# Altium PCB RF315Mhz.PcbDoc (part 5 of 5)
Units mil, origin at the board's own origin, x right, y up, seen from the top; angles counter-clockwise.
Board outline 4094.49 x 3779.53 mil, 2 copper layers (Top Layer, Bottom Layer); 180 components, 20 nets, 660 pads, 48 vias.
Unrouted connection lines stored in the file: 100.
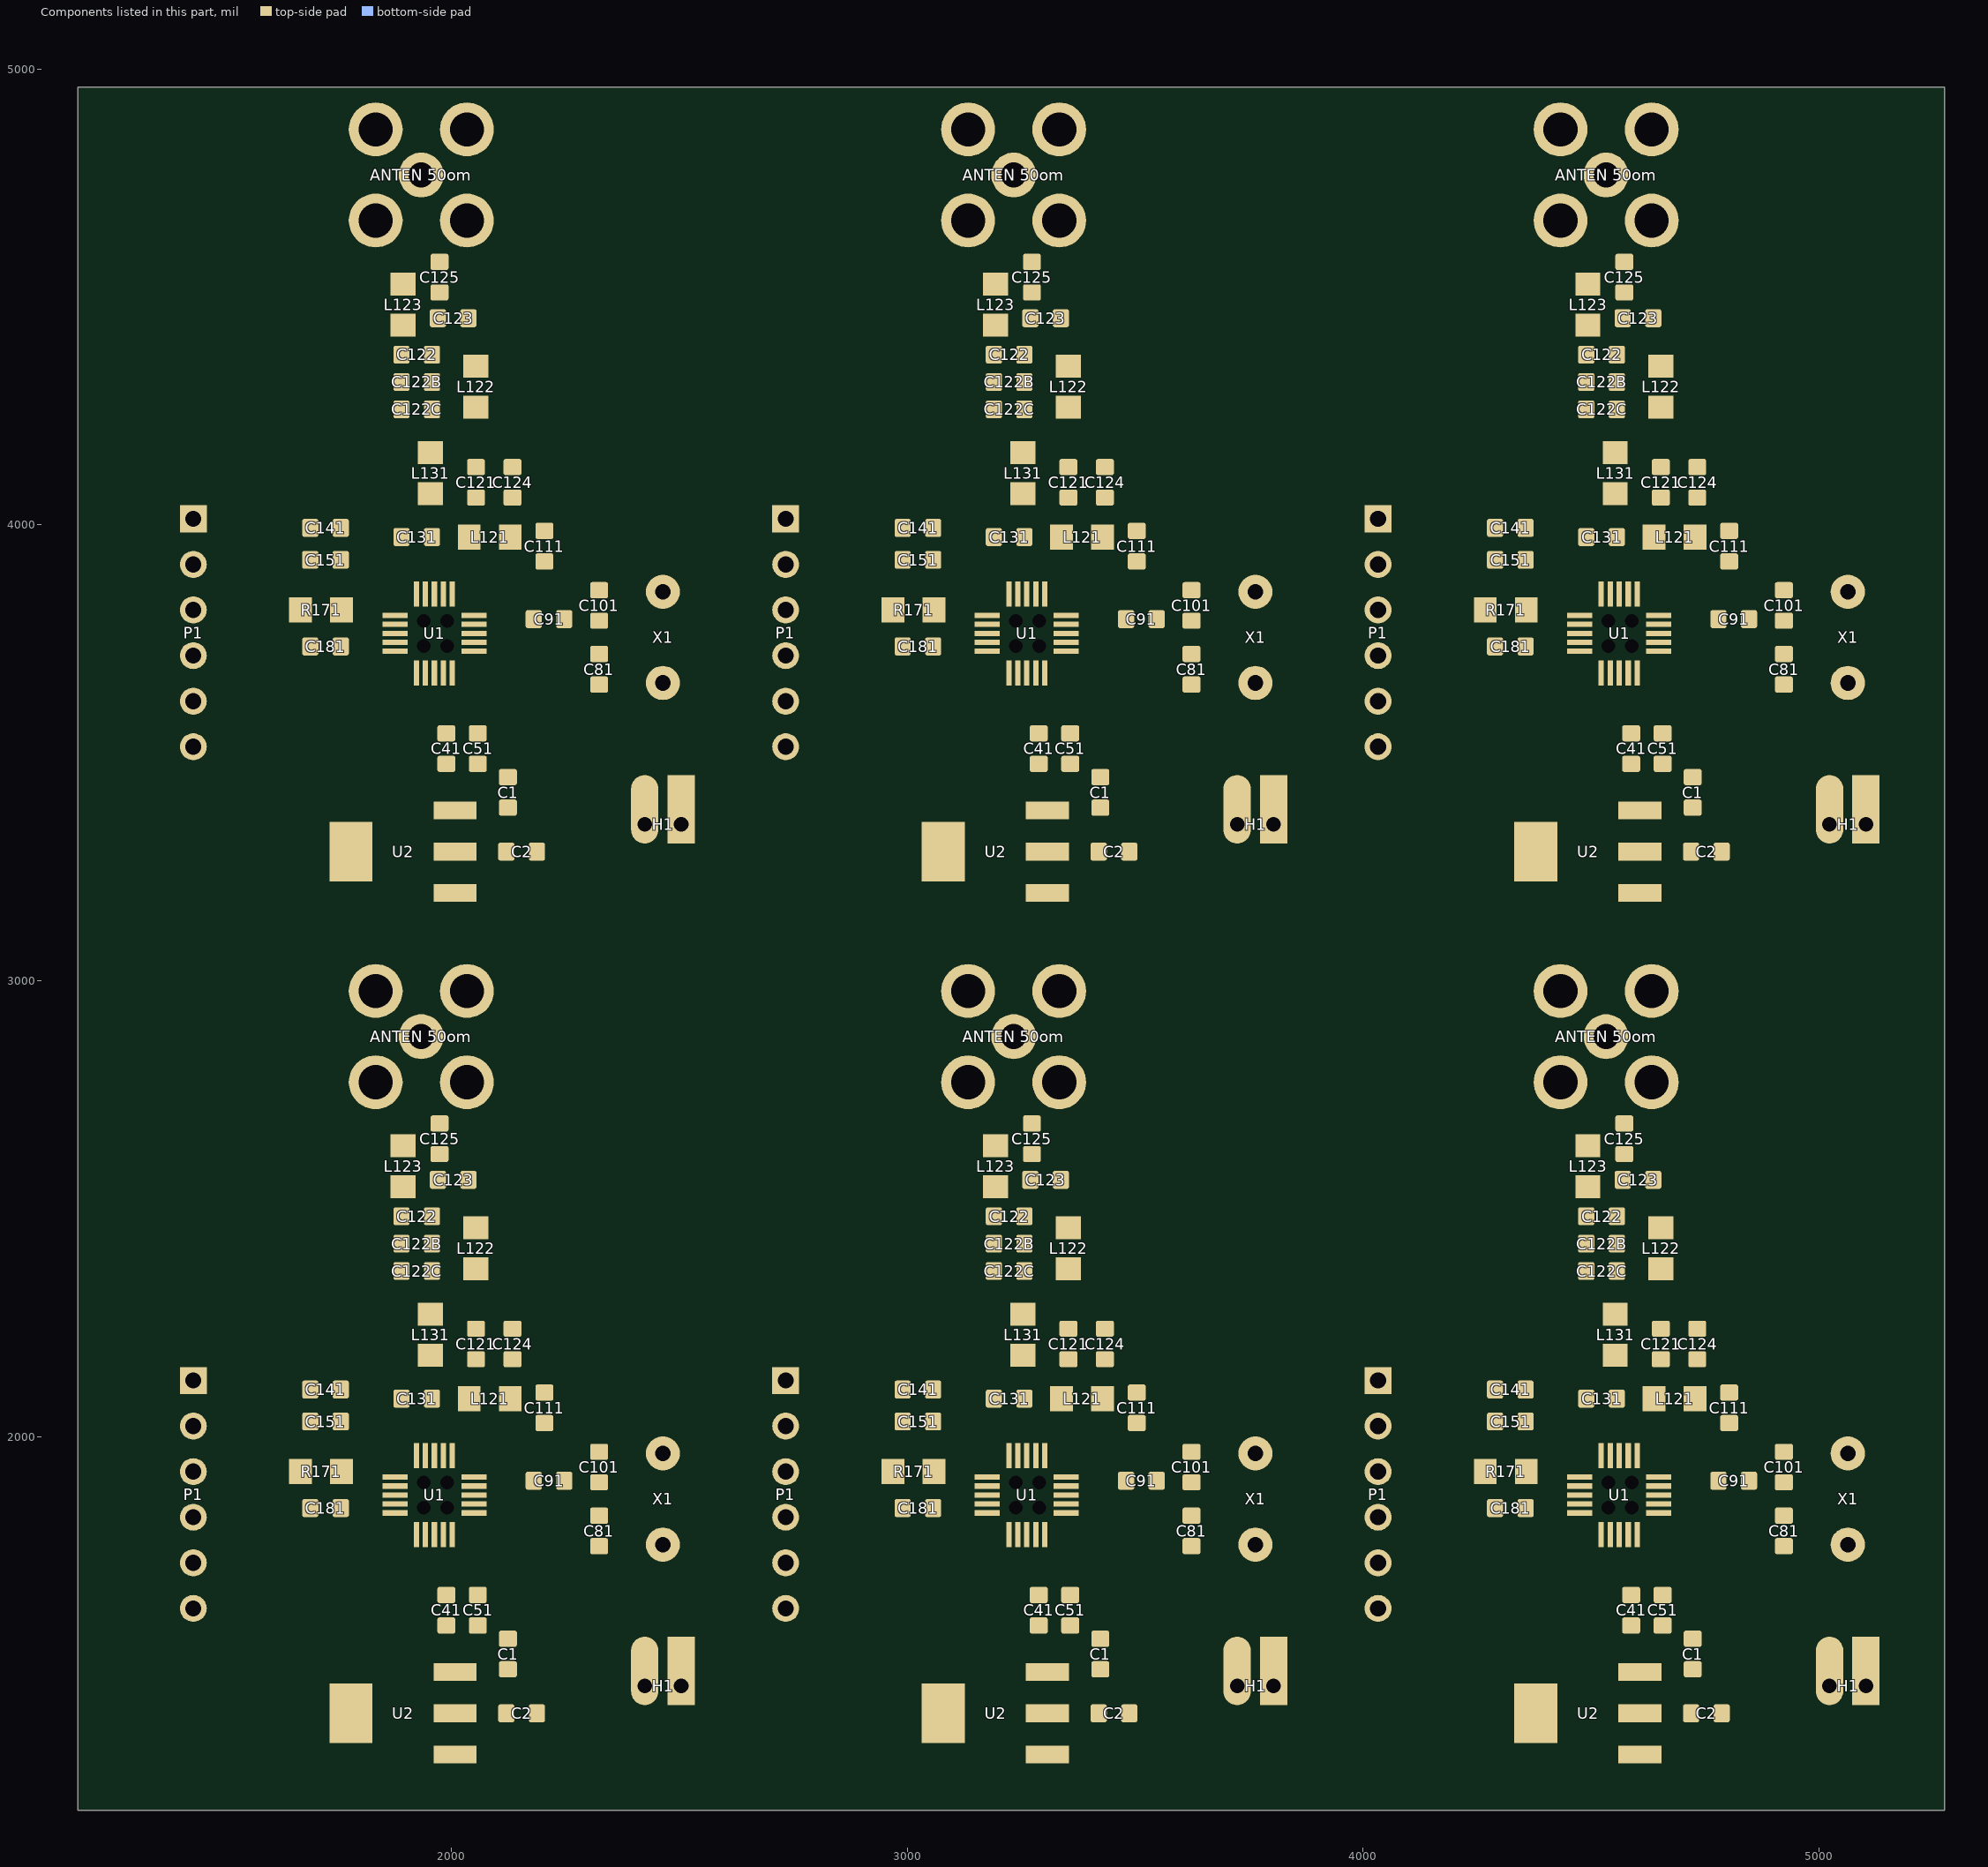
[diagram p5: the components of this part, seen from the top]

## Via types
v1: diameter 50, hole 28, Top Layer to Bottom Layer, 48 vias

## Nets (pads, with @x,y where several pads share a name; then routed paths per layer and width w, separated by ;. In a path a pad name is that pad's centre, name@x,y a point inside that pad or via, vN(x,y) a via of type N, cw(c..) or ccw(c..) an arc to the next point about the centre after c; other vN are vias at no path point) (continued)
copper on no net: (continued)
  Top Layer w1: 5111.99,4848.54 5115.99,4848.54 ; 5111.99,4849.54 5114.99,4849.54 ; 5111.99,4850.54 5114.99,4850.54 ; 5112.99,2802.78 5115.99,2802.78 ; 5112.99,2803.78 5115.99,2803.78 ; 5112.99,2956.78 5115.99,2956.78 ; 5112.99,2957.78 5115.99,2957.78 ; 5112.99,4692.54 5115.99,4692.54 ; 5112.99,4693.54 5115.99,4693.54 ; 5112.99,4846.54 5115.99,4846.54 ; 5112.99,4847.54 5115.99,4847.54 ; 5113.99,2804.78 5116.99,2804.78 ; 5113.99,2805.78 5116.99,2805.78 ; 5113.99,2806.78 5116.99,2806.78 ; 5113.99,2807.78 5116.99,2807.78 ; 5113.99,2952.78 5117.99,2952.78 ; 5113.99,2953.78 5116.99,2953.78 ; 5113.99,2954.78 5116.99,2954.78 ; 5113.99,2955.78 5116.99,2955.78 ; 5113.99,4694.54 5116.99,4694.54 ; 5113.99,4695.54 5116.99,4695.54 ; 5113.99,4696.54 5116.99,4696.54 ; 5113.99,4697.54 5116.99,4697.54 ; 5113.99,4842.54 5117.99,4842.54 ; 5113.99,4843.54 5116.99,4843.54 ; 5113.99,4844.54 5116.99,4844.54 ; 5113.99,4845.54 5116.99,4845.54 ; 5114.99,2808.78 5117.99,2808.78 ; 5114.99,2809.78 5117.99,2809.78 ; 5114.99,2810.78 5117.99,2810.78 ; 5114.99,2811.78 5117.99,2811.78 ; 5114.99,2812.78 5117.99,2812.78 ; 5114.99,2813.78 5117.99,2813.78 ; 5114.99,2814.78 5117.99,2814.78 ; 5114.99,2815.78 5117.99,2815.78 ; 5114.99,2816.78 5117.99,2816.78 ; 5114.99,2817.78 5117.99,2817.78 ; 5114.99,2818.78 5117.99,2818.78 ; 5114.99,2819.78 5117.99,2819.78 ; 5114.99,2820.78 5117.99,2820.78 ; 5114.99,2821.78 5117.99,2821.78 ; 5114.99,2822.78 5117.99,2822.78 ; 5114.99,2823.78 5117.99,2823.78 ; 5114.99,2824.78 5117.99,2824.78 ; 5114.99,2825.78 5117.99,2825.78 ; 5114.99,2826.78 5117.99,2826.78 ; 5114.99,2827.78 5117.99,2827.78 ; 5114.99,2828.78 5117.99,2828.78 ; 5114.99,2829.78 5117.99,2829.78 ; 5114.99,2830.78 5117.99,2830.78 ; 5114.99,2831.78 5117.99,2831.78 ; 5114.99,2832.78 5117.99,2832.78 ; 5114.99,2833.78 5117.99,2833.78 ; 5114.99,2834.78 5117.99,2834.78 ; 5114.99,2835.78 5117.99,2835.78 ; 5114.99,2836.78 5117.99,2836.78 ; 5114.99,2837.78 5117.99,2837.78 ; 5114.99,2838.78 5117.99,2838.78 ; 5114.99,2839.78 5117.99,2839.78 ; 5114.99,2840.78 5117.99,2840.78 ; 5114.99,2841.78 5117.99,2841.78 ; 5114.99,2842.78 5117.99,2842.78 ; 5114.99,2843.78 5117.99,2843.78 ; 5114.99,2844.78 5117.99,2844.78 ; 5114.99,2845.78 5117.99,2845.78 ; 5114.99,2846.78 5117.99,2846.78 ; 5114.99,2847.78 5117.99,2847.78 ; 5114.99,2848.78 5117.99,2848.78 ; 5114.99,2849.78 5117.99,2849.78 ; 5114.99,2850.78 5117.99,2850.78 ; 5114.99,2851.78 5117.99,2851.78 ; 5114.99,2852.78 5117.99,2852.78 ; 5114.99,2853.78 5117.99,2853.78 ; 5114.99,2854.78 5117.99,2854.78 ; 5114.99,2855.78 5117.99,2855.78 ; 5114.99,2856.78 5117.99,2856.78 ; 5114.99,2857.78 5117.99,2857.78 ; 5114.99,2858.78 5117.99,2858.78 ; 5114.99,2859.78 5117.99,2859.78 ; 5114.99,2860.78 5117.99,2860.78 ; 5114.99,2861.78 5117.99,2861.78 ; 5114.99,2862.78 5117.99,2862.78 ; 5114.99,2863.78 5117.99,2863.78 ; 5114.99,2864.78 5117.99,2864.78 ; 5114.99,2865.78 5117.99,2865.78 ; 5114.99,2866.78 5117.99,2866.78 ; 5114.99,2867.78 5117.99,2867.78 ; 5114.99,2868.78 5117.99,2868.78 ; 5114.99,2869.78 5117.99,2869.78 ; 5114.99,2870.78 5117.99,2870.78 ; 5114.99,2871.78 5117.99,2871.78 ; 5114.99,2872.78 5117.99,2872.78 ; 5114.99,2873.78 5117.99,2873.78 ; 5114.99,2874.78 5117.99,2874.78 ; 5114.99,2875.78 5117.99,2875.78 ; 5114.99,2876.78 5117.99,2876.78 ; 5114.99,2877.78 5117.99,2877.78 ; 5114.99,2878.78 5117.99,2878.78 ; 5114.99,2879.78 5117.99,2879.78 ; 5114.99,2880.78 5117.99,2880.78 ; 5114.99,2881.78 5117.99,2881.78 ; 5114.99,2882.78 5117.99,2882.78 ; 5114.99,2883.78 5117.99,2883.78 ; 5114.99,2884.78 5117.99,2884.78 ; 5114.99,2885.78 5117.99,2885.78 ; 5114.99,2886.78 5117.99,2886.78 ; 5114.99,2887.78 5117.99,2887.78 ; 5114.99,2888.78 5117.99,2888.78 ; 5114.99,2889.78 5117.99,2889.78 ; 5114.99,2890.78 5117.99,2890.78 ; 5114.99,2891.78 5117.99,2891.78 ; 5114.99,2892.78 5117.99,2892.78 ; 5114.99,2893.78 5117.99,2893.78 ; 5114.99,2894.78 5117.99,2894.78 ; 5114.99,2895.78 5117.99,2895.78 ; 5114.99,2896.78 5117.99,2896.78 ; 5114.99,2897.78 5117.99,2897.78 ; 5114.99,2898.78 5117.99,2898.78 ; 5114.99,2899.78 5117.99,2899.78 ; 5114.99,2900.78 5117.99,2900.78 ; 5114.99,2901.78 5117.99,2901.78 ; 5114.99,2902.78 5117.99,2902.78 ; 5114.99,2903.78 5117.99,2903.78 ; 5114.99,2904.78 5117.99,2904.78 ; 5114.99,2905.78 5117.99,2905.78 ; 5114.99,2906.78 5117.99,2906.78 ; 5114.99,2907.78 5117.99,2907.78 ; 5114.99,2908.78 5117.99,2908.78 ; 5114.99,2909.78 5117.99,2909.78 ; 5114.99,2910.78 5117.99,2910.78 ; 5114.99,2911.78 5117.99,2911.78 ; 5114.99,2912.78 5117.99,2912.78 ; 5114.99,2913.78 5117.99,2913.78 ; 5114.99,2914.78 5117.99,2914.78 ; 5114.99,2915.78 5117.99,2915.78 ; 5114.99,2916.78 5117.99,2916.78 ; 5114.99,2917.78 5117.99,2917.78 ; 5114.99,2918.78 5117.99,2918.78 ; 5114.99,2919.78 5117.99,2919.78 ; 5114.99,2920.78 5117.99,2920.78 ; 5114.99,2921.78 5117.99,2921.78 ; 5114.99,2922.78 5117.99,2922.78 ; 5114.99,2923.78 5117.99,2923.78 ; 5114.99,2924.78 5117.99,2924.78 ; 5114.99,2925.78 5117.99,2925.78 ; 5114.99,2926.78 5117.99,2926.78 ; 5114.99,2927.78 5117.99,2927.78 ; 5114.99,2928.78 5117.99,2928.78 ; 5114.99,2929.78 5117.99,2929.78 ; 5114.99,2930.78 5117.99,2930.78 ; 5114.99,2931.78 5117.99,2931.78 ; 5114.99,2932.78 5117.99,2932.78 ; 5114.99,2933.78 5117.99,2933.78 ; 5114.99,2934.78 5117.99,2934.78 ; 5114.99,2935.78 5117.99,2935.78 ; 5114.99,2936.78 5117.99,2936.78 ; 5114.99,2937.78 5117.99,2937.78 ; 5114.99,2938.78 5117.99,2938.78 ; 5114.99,2939.78 5117.99,2939.78 ; 5114.99,2940.78 5117.99,2940.78 ; 5114.99,2941.78 5117.99,2941.78 ; 5114.99,2942.78 5117.99,2942.78 ; 5114.99,2943.78 5117.99,2943.78 ; 5114.99,2944.78 5117.99,2944.78 ; 5114.99,2945.78 5117.99,2945.78 ; 5114.99,2946.78 5117.99,2946.78 ; 5114.99,2947.78 5117.99,2947.78 ; 5114.99,2948.78 5117.99,2948.78 ; 5114.99,2949.78 5117.99,2949.78 ; 5114.99,2950.78 5117.99,2950.78 ; 5114.99,2951.78 5117.99,2951.78 ; 5114.99,4698.54 5117.99,4698.54 ; 5114.99,4699.54 5117.99,4699.54 ; 5114.99,4700.54 5117.99,4700.54 ; 5114.99,4701.54 5117.99,4701.54 ; 5114.99,4702.54 5117.99,4702.54 ; 5114.99,4703.54 5117.99,4703.54 ; 5114.99,4704.54 5117.99,4704.54 ; 5114.99,4705.54 5117.99,4705.54 ; 5114.99,4706.54 5117.99,4706.54 ; 5114.99,4707.54 5117.99,4707.54 ; 5114.99,4708.54 5117.99,4708.54 ; 5114.99,4709.54 5117.99,4709.54 ; 5114.99,4710.54 5117.99,4710.54 ; 5114.99,4711.54 5117.99,4711.54 ; 5114.99,4712.54 5117.99,4712.54 ; 5114.99,4713.54 5117.99,4713.54 ; 5114.99,4714.54 5117.99,4714.54 ; 5114.99,4715.54 5117.99,4715.54 ; 5114.99,4716.54 5117.99,4716.54 ; 5114.99,4717.54 5117.99,4717.54 ; 5114.99,4718.54 5117.99,4718.54 ; 5114.99,4719.54 5117.99,4719.54 ; 5114.99,4720.54 5117.99,4720.54 ; 5114.99,4721.54 5117.99,4721.54 ; 5114.99,4722.54 5117.99,4722.54 ; 5114.99,4723.54 5117.99,4723.54 ; 5114.99,4724.54 5117.99,4724.54 ; 5114.99,4725.54 5117.99,4725.54 ; 5114.99,4726.54 5117.99,4726.54 ; 5114.99,4727.54 5117.99,4727.54 ; 5114.99,4728.54 5117.99,4728.54 ; 5114.99,4729.54 5117.99,4729.54 ; 5114.99,4730.54 5117.99,4730.54 ; 5114.99,4731.54 5117.99,4731.54 ; 5114.99,4732.54 5117.99,4732.54 ; 5114.99,4733.54 5117.99,4733.54 ; 5114.99,4734.54 5117.99,4734.54 ; 5114.99,4735.54 5117.99,4735.54 ; 5114.99,4736.54 5117.99,4736.54 ; 5114.99,4737.54 5117.99,4737.54 ; 5114.99,4738.54 5117.99,4738.54 ; 5114.99,4739.54 5117.99,4739.54 ; 5114.99,4740.54 5117.99,4740.54 ; 5114.99,4741.54 5117.99,4741.54 ; 5114.99,4742.54 5117.99,4742.54 ; 5114.99,4743.54 5117.99,4743.54 ; 5114.99,4744.54 5117.99,4744.54 ; 5114.99,4745.54 5117.99,4745.54 ; 5114.99,4746.54 5117.99,4746.54 ; 5114.99,4747.54 5117.99,4747.54 ; 5114.99,4748.54 5117.99,4748.54 ; 5114.99,4749.54 5117.99,4749.54 ; 5114.99,4750.54 5117.99,4750.54 ; 5114.99,4751.54 5117.99,4751.54 ; 5114.99,4752.54 5117.99,4752.54 ; 5114.99,4753.54 5117.99,4753.54 ; 5114.99,4754.54 5117.99,4754.54 ; 5114.99,4755.54 5117.99,4755.54 ; 5114.99,4756.54 5117.99,4756.54 ; 5114.99,4757.54 5117.99,4757.54 ; 5114.99,4758.54 5117.99,4758.54 ; 5114.99,4759.54 5117.99,4759.54 ; 5114.99,4760.54 5117.99,4760.54 ; 5114.99,4761.54 5117.99,4761.54 ; 5114.99,4762.54 5117.99,4762.54 ; 5114.99,4763.54 5117.99,4763.54 ; 5114.99,4764.54 5117.99,4764.54 ; 5114.99,4765.54 5117.99,4765.54 ; 5114.99,4766.54 5117.99,4766.54 ; 5114.99,4767.54 5117.99,4767.54 ; 5114.99,4768.54 5117.99,4768.54 ; 5114.99,4769.54 5117.99,4769.54 ; 5114.99,4770.54 5117.99,4770.54 ; 5114.99,4771.54 5117.99,4771.54 ; 5114.99,4772.54 5117.99,4772.54 ; 5114.99,4773.54 5117.99,4773.54 ; 5114.99,4774.54 5117.99,4774.54 ; 5114.99,4775.54 5117.99,4775.54 ; 5114.99,4776.54 5117.99,4776.54 ; 5114.99,4777.54 5117.99,4777.54 ; 5114.99,4778.54 5117.99,4778.54 ; 5114.99,4779.54 5117.99,4779.54 ; 5114.99,4780.54 5117.99,4780.54 ; 5114.99,4781.54 5117.99,4781.54 ; 5114.99,4782.54 5117.99,4782.54 ; 5114.99,4783.54 5117.99,4783.54 ; 5114.99,4784.54 5117.99,4784.54 ; 5114.99,4785.54 5117.99,4785.54 ; 5114.99,4786.54 5117.99,4786.54 ; 5114.99,4787.54 5117.99,4787.54 ; 5114.99,4788.54 5117.99,4788.54 ; 5114.99,4789.54 5117.99,4789.54 ; 5114.99,4790.54 5117.99,4790.54 ; 5114.99,4791.54 5117.99,4791.54 ; 5114.99,4792.54 5117.99,4792.54 ; 5114.99,4793.54 5117.99,4793.54 ; 5114.99,4794.54 5117.99,4794.54 ; 5114.99,4795.54 5117.99,4795.54 ; 5114.99,4796.54 5117.99,4796.54 ; 5114.99,4797.54 5117.99,4797.54 ; 5114.99,4798.54 5117.99,4798.54 ; 5114.99,4799.54 5117.99,4799.54 ; 5114.99,4800.54 5117.99,4800.54 ; 5114.99,4801.54 5117.99,4801.54 ; 5114.99,4802.54 5117.99,4802.54 ; 5114.99,4803.54 5117.99,4803.54 ; 5114.99,4804.54 5117.99,4804.54 ; 5114.99,4805.54 5117.99,4805.54 ; 5114.99,4806.54 5117.99,4806.54 ; 5114.99,4807.54 5117.99,4807.54 ; 5114.99,4808.54 5117.99,4808.54 ; 5114.99,4809.54 5117.99,4809.54 ; 5114.99,4810.54 5117.99,4810.54 ; 5114.99,4811.54 5117.99,4811.54 ; 5114.99,4812.54 5117.99,4812.54 ; 5114.99,4813.54 5117.99,4813.54 ; 5114.99,4814.54 5117.99,4814.54 ; 5114.99,4815.54 5117.99,4815.54 ; 5114.99,4816.54 5117.99,4816.54 ; 5114.99,4817.54 5117.99,4817.54 ; 5114.99,4818.54 5117.99,4818.54 ; 5114.99,4819.54 5117.99,4819.54 ; 5114.99,4820.54 5117.99,4820.54 ; 5114.99,4821.54 5117.99,4821.54 ; 5114.99,4822.54 5117.99,4822.54 ; 5114.99,4823.54 5117.99,4823.54 ; 5114.99,4824.54 5117.99,4824.54 ; 5114.99,4825.54 5117.99,4825.54 ; 5114.99,4826.54 5117.99,4826.54 ; 5114.99,4827.54 5117.99,4827.54 ; 5114.99,4828.54 5117.99,4828.54 ; 5114.99,4829.54 5117.99,4829.54 ; 5114.99,4830.54 5117.99,4830.54 ; 5114.99,4831.54 5117.99,4831.54 ; 5114.99,4832.54 5117.99,4832.54 ; 5114.99,4833.54 5117.99,4833.54 ; 5114.99,4834.54 5117.99,4834.54 ; 5114.99,4835.54 5117.99,4835.54 ; 5114.99,4836.54 5117.99,4836.54 ; 5114.99,4837.54 5117.99,4837.54 ; 5114.99,4838.54 5117.99,4838.54 ; 5114.99,4839.54 5117.99,4839.54 ; 5114.99,4840.54 5117.99,4840.54 ; 5114.99,4841.54 5117.99,4841.54

## Polygon pours and split planes (outlines as drawn)
GND on Top Layer "Top Layer-No Net" (solid, remove dead copper, pour order 13): 3922.99,1213.78 5212.99,1213.78 5212.99,3063.78 3922.99,3063.78
GND on Top Layer "Top Layer-No Net" (solid, remove dead copper, pour order 14): 3922.99,3103.54 5212.99,3103.54 5212.99,4953.54 3922.99,4953.54
GND on Top Layer "Top Layer-No Net" (solid, remove dead copper, pour order 15): 2623.78,3103.54 3913.78,3103.54 3913.78,4953.54 2623.78,4953.54
GND on Top Layer "Top Layer-No Net" (solid, remove dead copper, pour order 16): 1324.57,3103.54 2614.57,3103.54 2614.57,4953.54 1324.57,4953.54
GND on Top Layer "Top Layer-No Net" (solid, remove dead copper, pour order 17): 2623.78,1213.78 3913.78,1213.78 3913.78,3063.78 2623.78,3063.78
GND on Top Layer "Top Layer-No Net" (solid, remove dead copper, pour order 18): 1324.57,1213.78 2614.57,1213.78 2614.57,3063.78 1324.57,3063.78
GND on Bottom Layer "Top Layer-No Net" (solid, remove dead copper, pour order 19): 5212.99,1213.78 3922.99,1213.78 3922.99,3063.78 5212.99,3063.78
GND on Bottom Layer "Top Layer-No Net" (solid, remove dead copper, pour order 20): 5212.99,3103.54 3922.99,3103.54 3922.99,4953.54 5212.99,4953.54
GND on Bottom Layer "Top Layer-No Net" (solid, remove dead copper, pour order 21): 3913.78,3103.54 2623.78,3103.54 2623.78,4953.54 3913.78,4953.54
GND on Bottom Layer "Top Layer-No Net" (solid, remove dead copper, pour order 22): 2614.57,3103.54 1324.57,3103.54 1324.57,4953.54 2614.57,4953.54
GND on Bottom Layer "Top Layer-No Net" (solid, remove dead copper, pour order 23): 3913.78,1213.78 2623.78,1213.78 2623.78,3063.78 3913.78,3063.78
GND on Bottom Layer "Top Layer-No Net" (solid, remove dead copper, pour order 24): 2614.57,1213.78 1324.57,1213.78 1324.57,3063.78 2614.57,3063.78

## Keep-outs
Keep-Out Layer:
  lines w3.94: 1181.1,1181.1 5275.59,1181.1 5275.59,4960.63 1181.1,4960.63 ; 1299.21,1181.1 1299.21,4960.63 ; 1324.57,1213.78 1324.57,3063.78 2614.57,3063.78 2614.57,1213.78 1324.57,1213.78 ; 1324.57,3103.54 2614.57,3103.54 2614.57,4953.54 1324.57,4953.54 1324.57,3103.54 ; 2623.78,1213.78 3913.78,1213.78 3913.78,3063.78 2623.78,3063.78 2623.78,1213.78 ; 2623.78,3103.54 3913.78,3103.54 3913.78,4953.54 2623.78,4953.54 2623.78,3103.54 ; 3922.99,1213.78 5212.99,1213.78 5212.99,3063.78 3922.99,3063.78 3922.99,1213.78 ; 3922.99,3103.54 5212.99,3103.54 5212.99,4953.54 3922.99,4953.54 3922.99,3103.54

## Other copper
Top Layer:
  text "Binhbut" at 2324.57,4603.54 h60
  text "Binhbut" at 3623.78,4603.54 h60
  text "Binhbut" at 4922.99,4603.54 h60
  text "Binhbut" at 2324.57,2713.78 h60
  text "Binhbut" at 3623.78,2713.78 h60
  text "Binhbut" at 4922.99,2713.78 h60